# Altium PCB rgbController.PcbDoc
Units mil, origin at the board's own origin, x right, y up, seen from the top; angles counter-clockwise.
Board outline 3200 x 2470 mil, 2 copper layers (Top Layer, Bottom Layer); 44 components, 39 nets, 136 pads, 9 vias.
Unrouted connection lines stored in the file: 2.
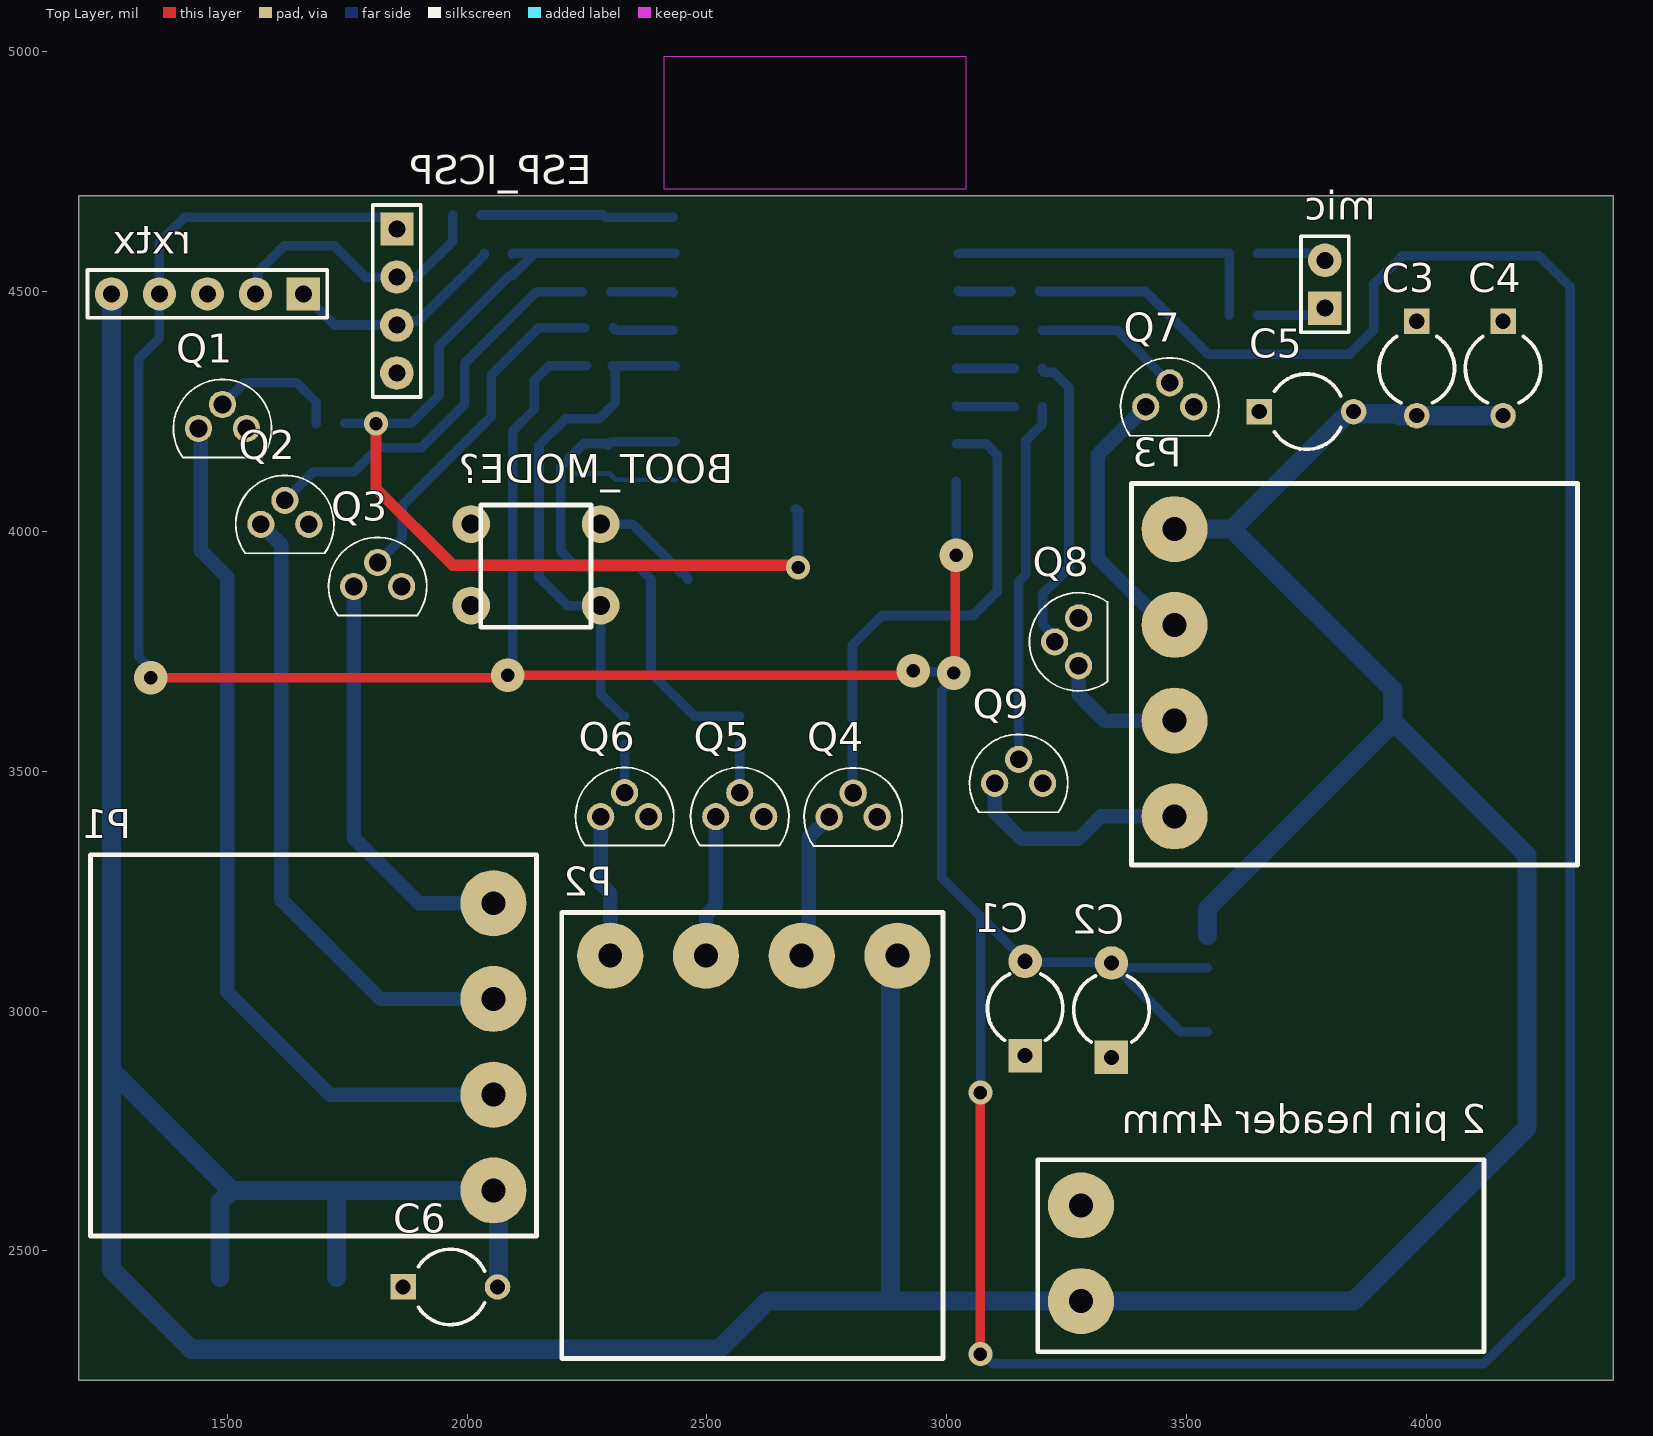
[diagram p0: Top Layer view]
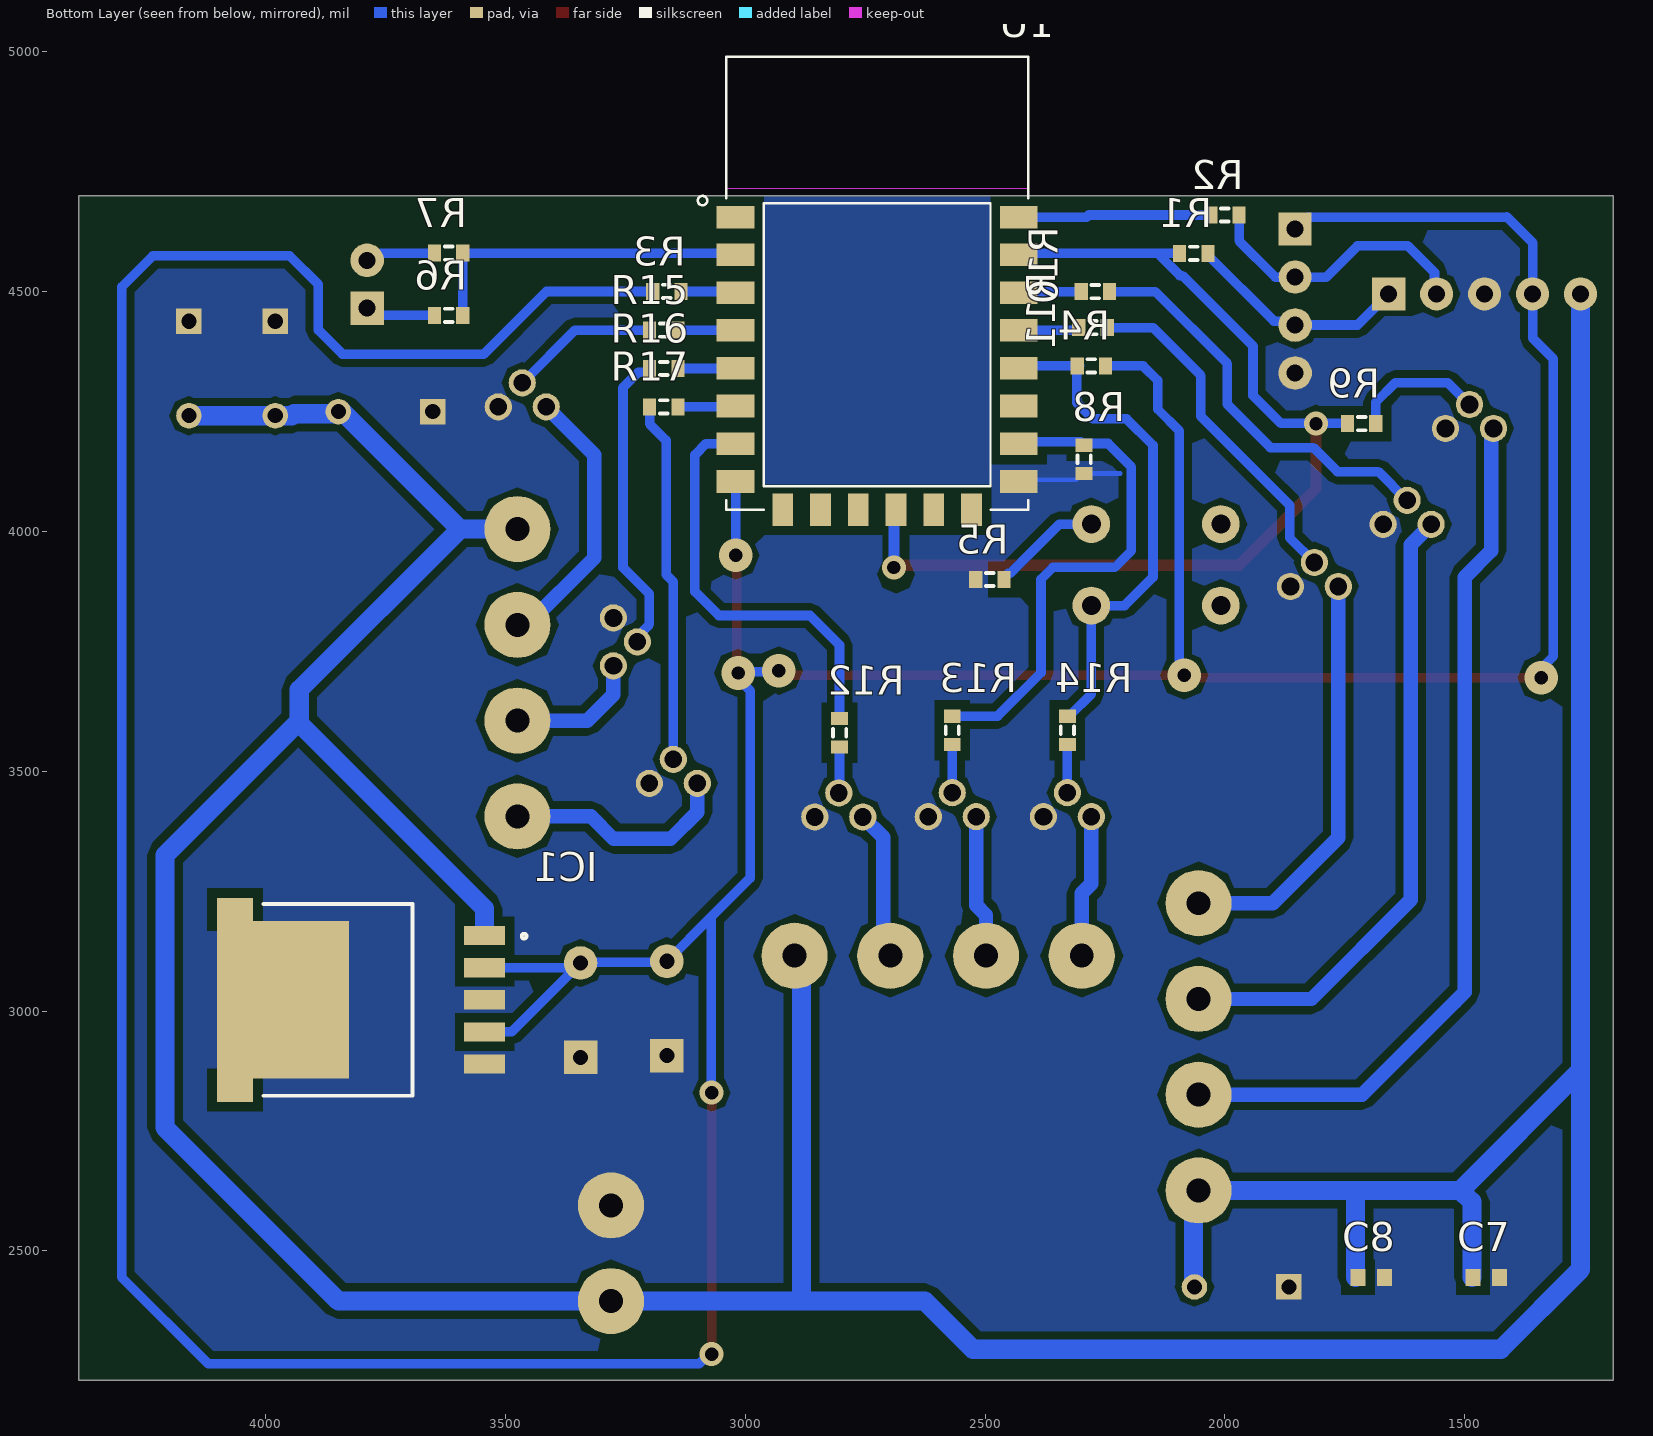
[diagram p1: Bottom Layer view, seen from below]

## Layer stack, top to bottom
Top Solder: solder mask 0.4, Solder Resist, Dk 3.5
Top Layer: signal copper 1.4
Dielectric 1: dielectric 12.6, FR-4, Dk 4.8
Bottom Layer: signal copper 1.4
Bottom Solder: solder mask 0.4, Solder Resist, Dk 3.5

## Board outline
1190,2230 4390,2230 4390,4700 1190,4700

## Design rules (kind name [scope] priority, off if disabled: settings)
Clearance [All] p1: gap=12 ignorepadtopadclearanceinfootprint=FALSE except(15: Arc-Fill Arc-Poly Arc-Region Track-Fill Track-Poly Track-Region; 20: Arc-Arc Arc-Track Track-Track SMDPad-Fill SMDPad-Poly SMDPad-Region)
PlaneClearance [All] p1: clearance=40
PlaneConnect [All] p1: planeconnectstyle=Direct reliefexpansion=20 reliefentries=4 reliefconductorwidth=10 reliefairgap=10
PolygonConnect [All] p1: connectstyle=Direct reliefconductorwidth=10 reliefentries=4 polygonreliefangle="90 Angle" airgapwidth=10
RoomDefinition rgbController [InComponentClass('rgbController')] p1: confinementstyle=ConfineIn formatcopy=TRUE lockcomponents=FALSE outline 4425,2230 4950,2230 4950,2740 4425,2740
RoutingVias [All] p1: holewidth=28 width=50 viastyle="Through Hole" minholewidth=28 minwidth=50 maxholewidth=28 maxwidth=50
SolderMaskExpansion [All] p1: expansion=4 istentingtop=FALSE
Width [All] p1: maxlimit=10 minlimit=10 preferedwidth=10
28 further rules are at their usual default settings.

## Components (designator, comment, footprint, x,y, rotation, side; value= is the part's Value field where it differs from the comment)
"2 pin header 4mm" "2 pin header 4mm" "2 pin header 4mm" 4120,2715 r270 top
BOOT_MODE? "6x6 20mm touchbutton" "6x6 20mm touchbutton" 2128.46,3925.59 r180 top
C1 "Cap2" CAPR5-4X5#1 3163.46,3005.59 r90 top value=100pF
C2 "Cap2" CAPR5-4X5#1 3343.46,3002.17 r90 top value=100pF
C3 "Cap2" CAPR5-4X5#2 3980,4340 r270 top value=100uF
C4 "Cap2" CAPR5-4X5#2 4160,4340 r270 top value=33uF
C5 "Cap2" CAPR5-4X5#2 3750,4250 r0 top value=10uF
C6 "Cap2" CAPR5-4X5#2 1965,2425 r0 top value=100pF
C7 "Cap Semi" 1608[0603] 1455,2445 r0 bottom value=100nF
C8 "Cap Semi" 1608[0603] 1695,2445 r0 bottom value=100pF
ESP_ICSP "Header 4" HDR1X4 1853.46,4630.59 r270 top
IC1 "LM2576HVS-12" KTT0005B 4034.06,3023.66 r180 bottom
mic "Header 2" HDR1X2 3788.46,4465.59 r90 top
P1 "P" "4 pin header 4mm" 1820,2691.18 r90 top
P2 "P" "4 pin header 4mm" 2832.28,2880.59 r180 top
P3 "P" "4 pin header 4mm" 3710,3940 r270 top
Q1 "BC517G" TO-92_(TO-226) 1440,4215 r180 top
Q2 "BC517G" TO-92_(TO-226) 1570,4015 r180 top
Q3 "BC517G" TO-92_(TO-226) 1763.46,3885.59 r180 top
Q4 "BC517G" TO-92_(TO-226) 2755,3405 r180 top
Q5 "BC517G" TO-92_(TO-226) 2518.46,3405.59 r180 top
Q6 "BC517G" TO-92_(TO-226) 2278.46,3405.59 r180 top
Q7 "BC517G" TO-92_(TO-226) 3415,4260 r180 top
Q8 "BC517G" TO-92_(TO-226) 3275,3720 r270 top
Q9 "BC517G" TO-92_(TO-226) 3100,3475 r180 top
R1 "Res3" J1-0603 2065,4580 r0 bottom value=470R
R2 "Res3" J1-0603 2000,4660 r180 bottom value=470R
R3 "Res3" J1-0603 3163.46,4500.59 r0 bottom value=12K
R4 "Res3" J1-0603 2278.46,4345.59 r180 bottom value=12K
R5 "Res3" J1-0603 2490,3900 r0 bottom value=470R
R6 "Res3" J1-0603 3618.46,4450.59 r180 bottom value=3.3M
R7 "Res3" J1-0603 3618.46,4580.59 r180 bottom value=1.1M
R8 "Res3" J1-0603 2293.46,4150.59 r270 bottom value=12K
R9 "Res3" J1-0603 1715,4225 r180 bottom value=1K
R10 "Res3" J1-0603 2270,4500 r180 bottom value=1K
R11 "Res3" J1-0603 2275,4425 r180 bottom value=1K
R12 "Res3" J1-0603 2803.46,3580.59 r270 bottom value=1K
R13 "Res3" J1-0603 2568.46,3585.59 r270 bottom value=1K
R14 "Res3" J1-0603 2328.46,3585.59 r270 bottom value=1K
R15 "Res3" J1-0603 3170,4420 r0 bottom value=1K
R16 "Res3" J1-0603 3170,4340 r0 bottom value=1K
R17 "Res3" J1-0603 3170,4260 r0 bottom value=1K
rxtx "Header 5" HDR1X5 1658.46,4495.59 r180 top
U1 "ESP8266-12E/ESP-12E" XCVR_ESP8266-12E/ESP-12E 2725,4380 r180 bottom

## Footprints (in the part's own frame and the unit in brackets; to place one, negate y for a bottom-side part, rotate by r counter-clockwise, add the part's x,y. Pads: shape width x height; smd on the part's side, far side on the other; paste and mask are expansions set on the pad)
"2 pin header 4mm" [mm] "2 pin header 4mm"
  round 3.5 hole 1.27: 1(3.048,-21.336) 2(8.118,-21.336)
  silkscreen extent 0.64,-23.62 10.8,0
"4 pin header 4mm" [mm] "4 pin header 4mm"
  round 3.5 hole 1.27: 1(-1.651,-5.969) 2(3.419,-5.969) 3(8.489,-5.969) 4(13.559,-5.969)
  silkscreen extent -4.06,-8.25 16.13,15.37
"6x6 20mm touchbutton" [mm]
  round 2 hole 1: 1(-3.81,-2.286) 2(-3.81,2.032) 3(3.048,2.032) 4(3.048,-2.286)
  silkscreen extent -3.3,-3.3 2.54,3.18
1608[0603] [mm]
  rect 0.8x0.9 smd: 1(-0.7,0) 2(0.7,0)
  body extent -0.87,-0.48 0.87,0.48, height 1.3
CAPR5-4X5#1 [mil] "Capacitor; 2 Leads"
  rect 70x70 hole 31.5: 1(-98.43,0)
  round 70 hole 31.5: 2(98.43,0)
  silkscreen extent -66,-79 72,79
CAPR5-4X5#2 [mil]
  rect 53.15x53.15 hole 31.5: 1(-98.43,0)
  round 53.15 hole 31.5: 2(98.43,0)
  silkscreen extent -66,-79 72,79
HDR1X2 [mil] "Connector; Header; 2 Position"
  rect 70x70 hole 35.43: 1(0,0)
  round 70 hole 35.43: 2(100,0)
  silkscreen extent -50,-50 150,50
HDR1X4 [mil] "Connector; Header; 4 Position"
  rect 69.06x69.06 hole 35.43: 1(0,0)
  round 69.06 hole 35.43: 2(100,0)
  round 70 hole 35.43: 3(200,0) 4(300,0)
  silkscreen extent -50,-50 350,50
HDR1X5 [mm] "Connector; Header; 5 Position"
  rect 1.754x1.754 hole 0.9: 1(0,0)
  round 1.754 hole 0.9: 2(2.54,0) 3(5.08,0) 4(7.62,0) 5(10.16,0)
  silkscreen extent -1.27,-1.27 11.43,1.27
J1-0603 [mm] "Chip Resistor, Body 1.6x0.8mm, IPC High Density"
  rect 0.7x0.9 smd: 1(-0.75,0) 2(0.75,0)
  silkscreen extent -0.2,-0.35 0.2,0.35, body extent -0.85,-0.48 0.85,0.48, height 0.9
KTT0005B [mm]
  rect 2.16x1.02 smd: 1(12.461,3.4) 2(12.461,1.7) 3(12.461,0) 4(12.461,-1.7) 5(12.461,-3.4)
  rect 6.99x8.33 smd: 6(1.786,0)
  rect 1.91x1.235 smd: 7(-0.754,-4.782) 8(-0.754,4.782)
  silkscreen extent 0.76,-5.08 14.68,5.08, body extent 4.36,-5.08 18.71,5.08, height 4.72
TO-92_(TO-226) [mm]
  round 1.44 hole 0.94: 1(0,0) 2(-1.27,-1.27) 3(-2.54,0)
  silkscreen extent -3.87,-2.6 1.33,1.53, body extent -3.87,-2.48 1.33,1.71, height 7.24
XCVR_ESP8266-12E/ESP-12E [mm]
  rect 2x1.2 smd: 1(-7.5,7) 2(-7.5,5) 3(-7.5,3) 4(-7.5,1) 5(-7.5,-1) 6(-7.5,-3) 7(-7.5,-5) 8(-7.5,-7) 15(7.5,-7) 16(7.5,-5) 17(7.5,-3) 18(7.5,-1) 19(7.5,1) 20(7.5,3) 21(7.5,5) 22(7.5,7)
  rect 1.1x1.7 smd: 9(-5,-8.5) 10(-3,-8.5) 11(-1,-8.5) 12(1,-8.5) 13(3,-8.5) 14(5,-8.5)
  Keep-Out Layer region: 8,8.51 -8.009,8.51 -8.009,15.5 8,15.5
  Keep-Out Layer region: 8,8.51 -8.009,8.51 -8.009,15.5 8,15.5
  silkscreen extent -9.5,-8.5 8,15.5

## Part data
C1 C2 C3: "Capacitor", PackageDescription="Capacitor; 2 Leads", PackageReference=CAPR5-4X5, Published=23-Sep-2002, Publisher="Altium Limited"
C4: library part Cap2_1, "Capacitor", PackageDescription="Capacitor; 2 Leads", PackageReference=CAPR5-4X5, Published=23-Sep-2002, Publisher="Altium Limited"
C5: library part Cap2_2, "Capacitor", PackageDescription="Capacitor; 2 Leads", PackageReference=CAPR5-4X5, Published=23-Sep-2002, Publisher="Altium Limited"
C6: library part Cap2_3, "Capacitor", PackageDescription="Capacitor; 2 Leads", PackageReference=CAPR5-4X5, Published=23-Sep-2002, Publisher="Altium Limited"
C7: library part "Cap Semi_1", "Capacitor (Semiconductor SIM Model)", LatestRevisionDate=29-May-2009, LatestRevisionNote="IPC-7351 Footprint Added.", PackageDescription="Chip Capacitor", PackageReference=C1206, Published=8-Jun-2000, Publisher="Altium Limited"
C8: "Capacitor (Semiconductor SIM Model)", LatestRevisionDate=29-May-2009, LatestRevisionNote="IPC-7351 Footprint Added.", PackageDescription="Chip Capacitor", PackageReference=C1206, Published=8-Jun-2000, Publisher="Altium Limited"
ESP_ICSP: "Header, 4-Pin", LatestRevisionDate=17-Jul-2002, LatestRevisionNote="Re-released for DXP Platform.", Publisher="Altium Limited"
IC1: "Integrated Circuit", Manufacturer_Name="Texas Instruments", Mouser Part Number=926-LM2576HVS-12, Arrow Part Number=LM2576HVS-12, Arrow Price/Stock=https://www.arrow.com/en/products/lm2576hvs-12/texas-instruments?region=nac, Datasheet Link=http://www.ti.com/lit/ds/symlink/lm2576.pdf, Manufacturer_Part_Number=LM2576HVS-12, Mouser Price/Stock=https://www.mouser.co.uk/ProductDetail/Texas-Instruments/LM2576HVS-12?qs=X1J7HmVL2ZG26yVYlinkCQ%3D%3D
mic: "Header, 2-Pin", LatestRevisionDate=17-Jul-2002, LatestRevisionNote="Re-released for DXP Platform.", Publisher="Altium Limited"
P1 P2 P3: library part "4 pin header 4mm", "4 pin header 4mm"
Q1 Q2 Q3 Q4 Q5 Q6 Q7 Q8 Q9: "Transistor BJT NPN", Manufacturer_Name=onsemi, Mouser Part Number=863-BC517G, Datasheet Link=https://datasheet.datasheetarchive.com/originals/distributors/Datasheets-24/DSA-461072.pdf, Manufacturer_Part_Number=BC517G, Mouser Price/Stock=https://www.mouser.com/Search/Refine.aspx?Keyword=863-BC517G
R1 R2 R3 R4 R5 R6 R7 R8 R9 R10 R11 R12 R13 R14 R15 R16 R17: "Resistor", LatestRevisionDate=29-May-2009, LatestRevisionNote="IPC-7351 Footprint Added.", PackageDescription="Chip Resistor", PackageReference=J1-0603, Published=8-Jun-2000, Publisher="Altium Limited"
rxtx: "Header, 5-Pin", LatestRevisionDate=17-Jul-2002, LatestRevisionNote="Re-released for DXP Platform.", Publisher="Altium Limited"
U1: "This WiFi module has a 32-bit MCU micro and clock speeds supporting 80 MHz or 160 MHz. Supports the RTOS and integrated Wi-Fi MAC/BB/RF/PA/LNA, and has an on-board antenna.", Package=None, Availability=Unavailable, MF=AI-Thinker, MP=ESP8266-12E/ESP-12E, Price=None, SnapEDA_Link=https://www.snapeda.com/parts/ESP8266-12E/ESP-12E/AI-Thinker/view-part/106414/?ref=snap

## Via types
v1: diameter 70, hole 28, Top Layer to Bottom Layer, 5 vias
v2: diameter 50, hole 28, Top Layer to Bottom Layer, 4 vias

## Nets (pads, with @x,y where several pads share a name; then routed paths per layer and width w, separated by ;. In a path a pad name is that pad's centre, name@x,y a point inside that pad or via, vN(x,y) a via of type N, cw(c..) or ccw(c..) an arc to the next point about the centre after c; other vN are vias at no path point)
12V: "2 pin header 4mm.2" C3.2 C4.2 C5.2 C6.2 C7.2 C8.2 IC1.1 P1.1 P2.1 P3.1 rxtx.5 | length 10351.3
  Bottom Layer w40: rxtx.5 1258.46,2876.54 ; C7.2@1485.12,2445 1485.12,2602.48 1508.82,2626.18 ; C8.2@1727.56,2445 1727.56,2623.74 1730,2626.18 ; C6.2@2065.17,2425 2065.17,2616.01 P1.1 1730,2626.18 ; P2.1 2882.5,3100.81 2882.5,2395.39 ; P3.1 3595,4005 ; IC1.1 3543.46,3213.46 3930,3600 3930,3605 ; C4.2 C3.2 3945,4241.57 3940.79,4245.79 3852.64,4245.79 C5.2 3840,4250 3595,4005 ; 1258.46,2876.54 1258.46,2461.54 1425,2295 2525,2295 2625.39,2395.39 2882.5,2395.39 ; 1258.46,2876.54 1508.82,2626.18 ; 1508.82,2626.18 1730,2626.18 ; 2882.5,2395.39 3280,2395.39 3848.27,2395.39 4210,2757.13 4210,3325 3930,3605 ; 3595,4005 3930,3670 3930,3605
ESP_RX: ESP_ICSP.3 R1.1 rxtx.1 | length 468.1
  Bottom Layer w20: rxtx.1 1723.46,4430.59 ESP_ICSP.3 1861.46,4438.58 1897.99,4438.58 2035.47,4576.06 R1.1
ESP_TX: ESP_ICSP.2 R2.2 rxtx.2 | length 589
  Bottom Layer w20: rxtx.2 1562.99,4500.12 1562.99,4540.12 1618.46,4595.59 1723.46,4595.59 1788.46,4530.59 ESP_ICSP.2 1895,4530.59 1970.47,4606.06 R2.2
GND: "2 pin header 4mm.1" C1.1 C2.1 C3.1 C4.1 C5.1 C6.1 C7.1 C8.1 ESP_ICSP.4 IC1.3 IC1.5 IC1.6 Q1.3 Q2.3 Q3.3 Q4.3 Q5.3 Q6.3 Q7.3 Q8.3 Q9.3 R5.2 R8.2 rxtx.3 U1.15 | length 221
  Bottom Layer w10: 2217.99,4120.59 2218.46,4121.06 2297.4,4121.06 2310.31,4108.15 U1.15@2433.46,4108.15
NetBOOT_MODE?_1: BOOT_MODE?.1 R5.1 | length 232.2
  Bottom Layer w20: BOOT_MODE?.1 2344.88,4015.59 2447.76,3912.72 2451.69,3912.72 2460.47,3903.94 R5.1
NetBOOT_MODE?_2: BOOT_MODE?.2 R4.1 R14.1 U1.18 | length 1087
  Bottom Layer w20: R14.1 2324.53,3615.12 2278.46,3661.18 BOOT_MODE?.2 2209.41,3845.59 2150,3905 2150,4180 2205,4235 2275,4235 2308.46,4268.46 2308.46,4340.12 2302.99,4345.59 2432.24,4345.59 U1.18@2433.46,4344.37
Netmic_1: mic.1 R6.1 | length 146.7
  Bottom Layer w20: R6.1 3773.46,4450.59 mic.1
Netmic_2: mic.2 R7.1 | length 146.7
  Bottom Layer w20: R7.1 3760.19,4580.59 3775.19,4565.59 mic.2
NetP1_2: P1.2 Q1.1 | length 1843.6
  Bottom Layer w30: Q1.1 1445,4210 1445,3960 1500,3905 1500,3040 1520,3020 1714.21,2825.79 P1.2
NetP1_3: P1.3 Q2.1 | length 1328.4
  Bottom Layer w30: Q2.1 1612.5,3972.5 1612.5,3232.5 1819.61,3025.39 P1.3
NetP1_4: P1.4 Q3.1 | length 872.1
  Bottom Layer w30: Q3.1 1763.46,3361.54 1900,3225 P1.4
NetP2_2: P2.2 Q4.1 | length 313.2
  Bottom Layer w30: P2.2 2712.36,3130.28 2712.36,3199.49 2712.36,3362.36 Q4.1
NetP2_3: P2.3 Q5.1 | length 298.4
  Bottom Layer w30: P2.3 2498.07,3200.2 2518.46,3220.59 Q5.1
NetP2_4: P2.4 Q6.1 | length 298.3
  Bottom Layer w30: Q6.1 2278.46,3265.59 2298.46,3245.59 P2.4
NetP3_2: P3.2 Q7.1 | length 574.2
  Bottom Layer w30: Q7.1 3315,4160 3315,3945 3454.61,3805.39 P3.2
NetP3_3: P3.3 Q8.1 | length 282.5
  Bottom Layer w30: Q8.1 3275,3660 3329.21,3605.79 P3.3
NetP3_4: P3.4 Q9.1 | length 477.6
  Bottom Layer w30: Q9.1 3100,3415 3155.86,3359.14 3274.62,3359.14 3321.66,3406.18 P3.4
NetQ1_2: Q1.2 R9.2 | length 275.4
  Bottom Layer w20: Q1.2 1535,4310 1645,4310 1685.47,4269.53 R9.2
NetQ2_2: Q2.2 R10.2 | length 850.4
  Bottom Layer w20: Q2.2 1680,4125 1765.59,4125 1815.59,4175 1905,4175 1995,4265 1995,4350 2145,4500 R10.2
NetQ3_2: Q3.2 R11.2 | length 724.3
  Bottom Layer w20: Q3.2 1865,3987.13 1865,4055 2050,4240 2050,4325 2150,4425 R11.2
NetQ4_2: Q4.2 R12.2 | length 95.5
  Bottom Layer w20: Q4.2@2803.46,3455.59 R12.2
NetQ5_2: Q5.2 R13.2 | length 100.5
  Bottom Layer w20: Q5.2 R13.2
NetQ6_2: Q6.2 R14.2 | length 100.5
  Bottom Layer w20: Q6.2 R14.2
NetQ7_2: Q7.2 R15.2 | length 311
  Bottom Layer w20: R15.2 3355,4420 Q7.2
NetQ8_2: Q8.2 R16.2 | length 637.5
  Bottom Layer w20: R16.2 3199.53,4336.06 3203.31,4332.28 3222.72,4332.28 3255,4300 3255,3925 3200,3870 3200,3806.3 3225,3781.3 Q8.2
NetQ9_2: Q9.2 R17.2 | length 755.5
  Bottom Layer w20: Q9.2 3150,3895 3165,3910 3165,4190 3199.53,4224.53 R17.2
NetR1_2: R1.2 U1.21
NetR2_1: R2.1 U1.22 | length 402
  Bottom Layer w20: R2.1 2283.58,4660 2287.99,4655.59 U1.22
NetR3_1: R3.1 U1.1 U1.3 | length 110.4
  Bottom Layer w20: U1.3@3024.02,4501.85 3025.28,4500.59 R3.1
NetR6_2: R6.2 R7.2 U1.2 | length 694.9
  Bottom Layer w20: U1.2@3024.02,4580.59 3298.94,4580.59 R7.2 R6.2
NetR8_1: R8.1 R13.1 U1.16 | length 1068.3
  Bottom Layer w20: U1.16@2433.46,4186.89 2300.24,4186.89 R8.1 2290.08,4183.5 2243.5,4183.5 2195,4135 2195,3960 2229.41,3925.59 2358.46,3925.59 2383.46,3900.59 2383.46,3705.59 2473.94,3615.12 R13.1
NetR9_1: R9.1 U1.12 | length 2140.9
  Top Layer w23.62: v2(1810,4225) 1810,4090 1970,3930 2685,3930 v2(2690,3925)
  Bottom Layer w20: R9.1@1745,4225.59 1883.46,4225.59 1941.44,4283.56 1941.44,4386.44 2088.56,4533.56 2093.56,4533.56 2135,4575 ; 2094.53,4578.78 2094.53,4580 2192.87,4580 2193.46,4580.59 2433.46,4580.59
  Bottom Layer w23.62: U1.12 2690,4040.98 v2(2690,3925)
NetR10_1: R10.1 U1.20 | length 131
  Bottom Layer w20: R10.1 2427.83,4500 U1.20
NetR11_1: R11.1 U1.19 | length 127.5
  Bottom Layer w20: R11.1 2310.16,4419.37 U1.19
NetR12_1: R12.1 U1.7 | length 880.4
  Bottom Layer w20: R12.1 2803.46,3763.46 2865,3825 3055,3825 3105,3875 3105,4160 3081.85,4183.15 U1.7
NetR15_1: R15.1 U1.4 | length 120.5
  Bottom Layer w20: U1.4 3020.91,4420 R15.1
NetR16_1: R16.1 U1.5 | length 120.5
  Bottom Layer w20: U1.5 3020.91,4340 R16.1
NetR17_1: R17.1 U1.6 | length 121
  Bottom Layer w20: U1.6 3022.17,4260 R17.1
VCC: C1.2 C2.2 ESP_ICSP.1 IC1.2 IC1.4 R3.2 R4.2 rxtx.4 U1.8 | length 11190.5
  Top Layer w20: v1(1340,3695) 2080,3695 v1(2085,3700) v1@2900,3700 ; v1(3015,3705) 3017.64,3707.64 3017.64,3947.64 v1(3020.28,3950.28) ; v2(3070,2285) v2(3070,2830)
  Bottom Layer w20: v1(1340,3695) 1340,3715 1315,3740 1315,4360 1358.46,4403.46 rxtx.4 1358.46,4602.31 1412.61,4656.45 1413.94,4655.12 1828.94,4655.12 ESP_ICSP.1 ; v1@2095,3725.86 2095,4210 2140,4255 2140,4315 2170.59,4345.59 R4.2 ; v1(2930,3710) 2932.5,3707.5 3012.5,3707.5 v1(3015,3705) 3015,3693.28 2990,3668.28 2990,3277.48 3071.24,3196.24 ; v1(3020.28,3950.28) U1.8 ; v2(3070,2285) 3075.86,2285 3095.86,2265 4120,2265 4300,2445 4300,4510 4235,4575 3950,4575 3890,4515 3890,4420 3840,4370 3545,4370 3414.41,4500.59 R3.2 ; v2(3070,2830) 3071.24,2831.24 3071.24,3196.24 ; IC1.4 3487.32,2956.73 C2.2 ; IC1.2 3365.14,3090.59 3355.14,3100.59 C2.2 ; 3071.24,3196.24 C1.2 3165.18,3102.3 3341.75,3102.3 C2.2
pads on no net: BOOT_MODE?.3 BOOT_MODE?.4 IC1.7 IC1.8 U1.9 U1.10 U1.11 U1.13 U1.14 U1.17

## Polygon pours and split planes (outlines as drawn)
GND on Bottom Layer "GND_L02_P000" (solid, remove dead copper, pour order 0): 1190,4700 4390,4700 4390,2230 1190,2230